# Altium PCB ISL6236A_DEMO_PCB_V1H1.PcbDoc
Units mm, origin at the board's own origin, x right, y up, seen from the top; angles counter-clockwise.
Board outline 50 x 50 mm, 2 copper layers (Top Layer, Bottom Layer); 41 components, 26 nets, 119 pads, 0 vias.
Unrouted connection lines stored in the file: 92.
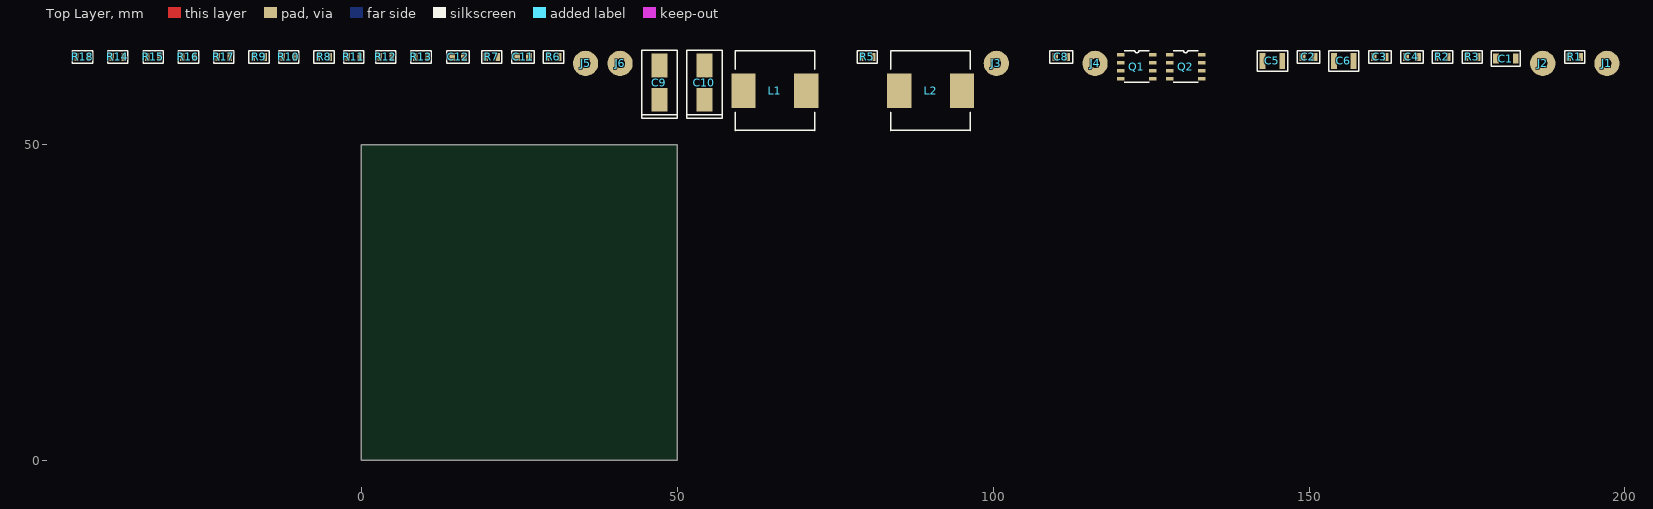
[diagram p0: Top Layer view]
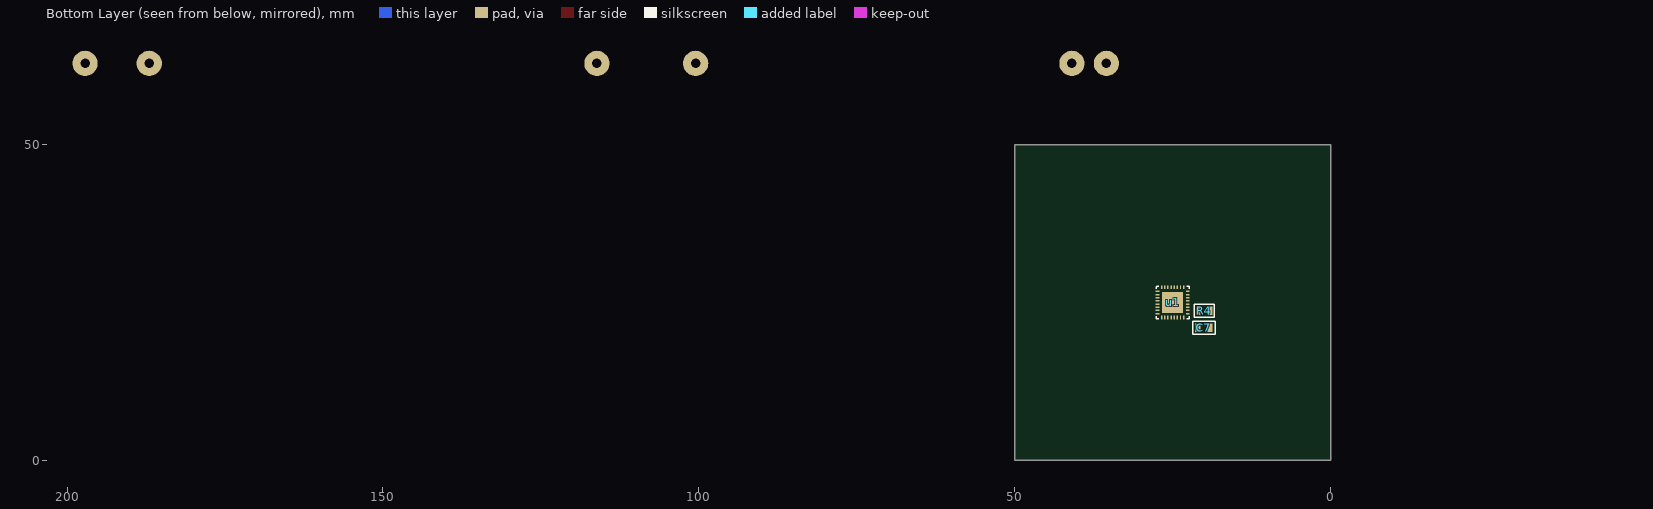
[diagram p1: Bottom Layer view, seen from below]

## Layer stack, top to bottom
Top Solder: solder mask 0.0102, Solder Resist, Dk 3.5
Top Layer: signal copper 0.0356
Dielectric 1: dielectric 0.32, FR-4, Dk 4.8
Bottom Layer: signal copper 0.0356
Bottom Solder: solder mask 0.0102, Solder Resist, Dk 3.5

## Board outline
0,0 50,0 50,50 0,50

## Design rules (kind name [scope] priority, off if disabled: settings)
Clearance [All] p1: gap=0.254 ignorepadtopadclearanceinfootprint=FALSE
MinimumSolderMaskSliver [All] p1: minsoldermaskwidth=0.1
PolygonConnect [All] p1: connectstyle=Relief reliefconductorwidth=0.254 reliefentries=4 polygonreliefangle="90 Angle" airgapwidth=0.254
RoutingVias [All] p1: holewidth=0.711 width=1.27 viastyle="Through Hole" minholewidth=0.711 minwidth=1.27 maxholewidth=0.711 maxwidth=1.27
SilkToSolderMaskClearance [IsPad] p1: minsilkscreentomaskgap=0.1 clearancetoexposedcopper=TRUE
SolderMaskExpansion [All] p1: expansion=0.102 istentingtop=FALSE
SupplyNets "Schematic Supply Nets_5" [InNet('+1v5')] p1: voltage=0.000
SupplyNets "Schematic Supply Nets_4" [InNet('+5v VCC')] p2: voltage=0.000
SupplyNets "Schematic Supply Nets_3" [InNet('GND')] p3: voltage=0.000
SupplyNets "Schematic Supply Nets_2" [InNet('+5v LDO')] p4: voltage=0.000
SupplyNets "Schematic Supply Nets_1" [InNet('+5v PVCC')] p5: voltage=0.000
SupplyNets "Schematic Supply Nets" [InNet('+VIN')] p6: voltage=0.000
Width [All] p1: maxlimit=0.254 minlimit=0.254 preferedwidth=0.254
28 further rules are at their usual default settings.

## Components (designator, comment, footprint, x,y, rotation, side; value= is the part's Value field where it differs from the comment)
C1 "4.7uF 50V" C1206 181.146,63.608 r0 top value=4.7uF
C2 "1 uF, 50 V," C0805 149.904,63.862 r0 top value=1uF
C3 "1 uF, 50 V," C0805 161.207,63.862 r0 top value=1uF
C4 "1 uF, 50 V," C0805 166.287,63.862 r0 top value=1uF
C5 "10uF 50V" C1210 144.189,63.227 r0 top value=10uF
C6 "10uF 50V" C1210 155.492,63.227 r0 top value=10uF
C7 "100nF" C0805 20.05,21 r180 bottom
C8 "220nF" C0805 110.788,63.862 r0 top
C9 "330uF, 10V" 7343-43 47.161,59.798 r90 top value=330uF
C10 "330uF, 10V" 7343-43 54.273,59.798 r90 top value=330uF
C11 "10nF" C0805 25.571,63.862 r0 top
C12 "100nF" C0805 15.284,63.862 r0 top
J1 "4MMx1.5MM" PAD_WITH_HOLE_4MMx1MM 197.148,62.846 r0 top
J2 "4MMx1.5MM" PAD_WITH_HOLE_4MMx1MM 186.988,62.846 r0 top
J3 "4MMx1.5MM" PAD_WITH_HOLE_4MMx1MM 100.501,62.846 r0 top
J4 "4MMx1.5MM" PAD_WITH_HOLE_4MMx1MM 116.122,62.846 r0 top
J5 "4MMx1.5MM" PAD_WITH_HOLE_4MMx1MM 35.477,62.846 r0 top
J6 "4MMx1.5MM" PAD_WITH_HOLE_4MMx1MM 40.938,62.846 r0 top
L1 "3u3, DR125-3R3-R" DR125 65.449,58.528 r0 top value=3.3uH
L2 "2u2, DR125-2R2-R" DR125 90.087,58.528 r0 top value=2.2uH
Q1 "SI4816BDY-T1-E3" SO-8 122.726,62.338 r0 top
Q2 "SI4816BDY-T1-E3" SO-8 130.473,62.338 r0 top
R1 "0 R" R0805 192.068,63.862 r0 top value=0R
R2 "0 R" R0805 171.113,63.862 r0 top value=0R
R3 "10 R" R0805 175.812,63.862 r0 top value=10R
R4 "1 R" R0805 20,23.7 r0 bottom
R5 "1 R" R0805 80.054,63.862 r0 top
R6 "200k" R0805 30.397,63.862 r0 top value=200kR
R7 "200k" R0805 20.618,63.862 r0 top value=200kR
R8 "10K" R0805 -5.925,63.862 r0 top value=10kR
R9 "200k" R0805 -16.212,63.862 r0 top value=200kR
R10 "200k" R0805 -11.513,63.862 r0 top value=200kR
R11 "10K" R0805 -1.226,63.862 r0 top value=10kR
R12 "DNF" R0805 3.854,63.862 r0 top
R13 "0 R" R0805 9.442,63.862 r0 top value=0R
R14 "DNF" R0805 -38.564,63.862 r0 top
R15 "0 R" R0805 -32.976,63.862 r0 top value=0R
R16 "DNF" R0805 -27.388,63.862 r0 top
R17 "DNF" R0805 -21.8,63.862 r0 top
R18 "DNF" R0805 -44.152,63.862 r0 top
u1 "ISL6236AIRZ" L32.5X5B 25,25 r180 bottom

## Footprints (in the part's own frame and the unit in brackets; to place one, negate y for a bottom-side part, rotate by r counter-clockwise, add the part's x,y. Pads: shape width x height; smd on the part's side, far side on the other; paste and mask are expansions set on the pad)
7343-43 [mm]
  rect 3.75x2.55 smd: 1(-2.7,0) 2(2.7,0)
  silkscreen extent -5.6,-2.8 5.1,2.8
C0805 [mm]
  rect 0.9x1.3 smd: 1(-0.95,0) 2(0.95,0)
  silkscreen extent -1.8,-1 1.8,1
C1206 [mm]
  rect 0.9x1.6 smd: 1(-1.55,0) 2(1.55,0)
  silkscreen extent -2.3,-1.2 2.3,1.2
C1210 [mm]
  rect 0.9x2.5 smd: 1(-1.55,0) 2(1.55,0)
  silkscreen extent -2.4,-1.6 2.4,1.6
DR125 [mm]
  rect 3.85x5.5 smd: 1(-4.975,0) 2(4.975,0)
  silkscreen extent -6.3,-6.3 6.3,6.3
L32.5X5B [mm]
  rect 0.6x0.23 smd mask+0.051: 1(-2.4,1.75) 2(-2.4,1.25) 3(-2.4,0.75) 4(-2.4,0.25) 5(-2.4,-0.25) 6(-2.4,-0.75) 7(-2.4,-1.25) 8(-2.4,-1.75) 17(2.4,-1.75) 18(2.4,-1.25) 19(2.4,-0.75) 20(2.4,-0.25) 21(2.4,0.25) 22(2.4,0.75) 23(2.4,1.25) 24(2.4,1.75)
  rect 0.23x0.6 smd mask+0.051: 9(-1.75,-2.4) 10(-1.25,-2.4) 11(-0.75,-2.4) 12(-0.25,-2.4) 13(0.25,-2.4) 14(0.75,-2.4) 15(1.25,-2.4) 16(1.75,-2.4) 25(1.75,2.4) 26(1.25,2.4) 27(0.75,2.4) 28(0.25,2.4) 29(-0.25,2.4) 30(-0.75,2.4) 31(-1.25,2.4) 32(-1.75,2.4)
  rect 3.3x3.3 smd mask+0.051: 33(0,0)
  silkscreen extent -2.6,-2.6 2.6,2.6
PAD_WITH_HOLE_4MMx1MM [mm]
  round 4 hole 1.5: 1(0,0)
R0805 [mm]
  rect 0.7x1.3 smd: 1(-0.95,0) 2(0.95,0)
  silkscreen extent -1.6,-1 1.6,1
SO-8 [mm]
  rect 1.194x0.559 smd: 1(-2.527,1.905) 2(-2.527,0.635) 3(-2.527,-0.635) 4(-2.527,-1.905) 5(2.528,-1.905) 6(2.528,-0.635) 7(2.528,0.635) 8(2.528,1.905)
  silkscreen extent -2,-2.5 2,2.5

## Part data
C1: library part C3216X5R1H475K160AB, "C Series 1206 4.7 uF 50 V ±10 % Tolerance X5R SMT Multilayer Ceramic Capacitor", Case Code (Imperial)=1206, Case Code (Metric)=3216, Dielectric=X5R, Dielectric Material=Ceramic, Manufacturer=TDK, Max Operating Temperature=85°C, Min Operating Temperature=-55°C, Package Quantity=2000, Tolerance=10%, Voltage Rating=50V, Case/Package=1206, Category="Ceramic Capacitors", ComponentLink1Description=https://datasheet.ciiva.com/24216/c3216x5r1h475k160ab-265269-24216325.pdf?src-supplier=Mouser, ComponentLink1URL=https://datasheet.ciiva.com/24216/c3216x5r1h475k160ab-265269-24216325.pdf?src-supplier=Mouser, ComponentLink2Description=https://datasheet.ciiva.com/6286/tdkmlcccaprange-6286230.pdf?src-supplier=Digikey, ComponentLink2URL=https://datasheet.ciiva.com/6286/tdkmlcccaprange-6286230.pdf?src-supplier=Digikey, ComponentLink3Description=https://datasheet.ciiva.com/6286/tdkmlcccaprange-6286233.pdf?src-supplier=Digikey, ComponentLink3URL=https://datasheet.ciiva.com/6286/tdkmlcccaprange-6286233.pdf?src-supplier=Digikey, ComponentLink4Description=https://datasheet.ciiva.com/6286/tdkmlcccaprange-6286236.pdf?src-supplier=Digikey, ComponentLink4URL=https://datasheet.ciiva.com/6286/tdkmlcccaprange-6286236.pdf?src-supplier=Digikey, Construction=Flat, Depth=1.6mm, Height=1.6mm, Lead Free="Lead Free", Length=3.2mm, Manufacturer Part Number=C3216X5R1H475K160AB, Mounting Technology="Surface Mount", Packaging="Tape and Reel", Pricing="487=0.2054, 500=0.1924 (USD)", RoHS=Yes, RoHS Compliant=Yes, Series=C, Stock=714, Supplier="Arrow Electronics", Supplier Part Number=C3216X5R1H475K160AB, Termination=SMD/SMT, Voltage Rating (DC)=50V, Weight=0.000571oz, Width=1.6mm
C2 C3 C4: library part C2012X7R1H105K125AB, "Multilayer Ceramic Capacitor, 1 uF, 50 V, ± 10%, X7R, 0805 [2012 Metric]", Case Code (Imperial)=0805, Case Code (Metric)=2012, Dielectric=X7R, Dielectric Material=Ceramic, Manufacturer=TDK, Max Operating Temperature=125°C, Min Operating Temperature=-55°C, Package Quantity=1, Supplier Part Number=445-7547-1-ND, Tolerance=10%, Voltage Rating=50V, Case/Package=0805, Category="Ceramic Capacitors", ComponentLink1Description=https://datasheet.ciiva.com/6274/tdkmlcccaprange-6274886.pdf?src-supplier=Digikey, ComponentLink1URL=https://datasheet.ciiva.com/6274/tdkmlcccaprange-6274886.pdf?src-supplier=Digikey, ComponentLink2Description=https://datasheet.ciiva.com/6274/tdkmlcccaprange-6274888.pdf?src-supplier=Digikey, ComponentLink2URL=https://datasheet.ciiva.com/6274/tdkmlcccaprange-6274888.pdf?src-supplier=Digikey, ComponentLink3Description=https://datasheet.ciiva.com/6274/tdkmlcccaprange-6274890.pdf?src-supplier=Digikey, ComponentLink3URL=https://datasheet.ciiva.com/6274/tdkmlcccaprange-6274890.pdf?src-supplier=Digikey, ComponentLink4Description=https://datasheet.ciiva.com/22718/1796654-22718037.pdf?src-supplier=Element14, ComponentLink4URL=https://datasheet.ciiva.com/22718/1796654-22718037.pdf?src-supplier=Element14, ComponentLink5Description=https://datasheet.ciiva.com/28673/mlcc-commercial-general-en-28673565.pdf?src-supplier=Element14, ComponentLink5URL=https://datasheet.ciiva.com/28673/mlcc-commercial-general-en-28673565.pdf?src-supplier=Element14, ComponentLink6Description=https://datasheet.ciiva.com/23803/1796654-23803036.pdf?src-supplier=Newark, ComponentLink6URL=https://datasheet.ciiva.com/23803/1796654-23803036.pdf?src-supplier=Newark, ComponentLink7Description=https://datasheet.ciiva.com/24191/general-b11-24191449.pdf?src-supplier=Future+Electronics, ComponentLink7URL=https://datasheet.ciiva.com/24191/general-b11-24191449.pdf?src-supplier=Future+Electronics, Construction=Flat, Depth=1.25mm, Height=1.25mm, Lead Free="Lead Free", Length=2mm, Manufacturer Part Number=C2012X7R1H105K125AB, Material=Ceramic, Mounting Technology="Surface Mount", Packaging="Tape and Reel", Pins=2, Pricing="1=0.28, 10=0.183, 50=0.1286, 100=0.1038, 500=0.07712, 1000=0.06749 (USD)", Reach SVHC Compliant=No, RoHS=Yes, RoHS Compliant=Yes, Series=C, Stock=83488, Supplier=Digikey, Thickness=0.057inch, Width=0.049inch
C5 C6: library part CL32A106KBJNNNE, "Multilayer Ceramic Capacitor, 10 uF, 50 V, ± 10%, X5R, 1210 [3225 Metric]", Case Code (Imperial)=1210, Case Code (Metric)=3225, Manufacturer=Samsung, Max Operating Temperature=85°C, Min Operating Temperature=-55°C, Tolerance=10%, Voltage Rating=50V, Case/Package=1210, Category="Ceramic Capacitors", ComponentLink1Description=https://datasheet.ciiva.com/25711/cl32a106kbjnnne-25711770.pdf?src-supplier=Digikey, ComponentLink1URL=https://datasheet.ciiva.com/25711/cl32a106kbjnnne-25711770.pdf?src-supplier=Digikey, Lead Free="Lead Free", Manufacturer Part Number=CL32A106KBJNNNE, Mounting Technology="Surface Mount", Packaging="Cut Tape", Pricing="577=0.1732, 1000=0.1386, 3000=0.1224, 6000=0.1134, 15000=0.1098, 30000=0.1063, 75000=0.1027 (USD)", RoHS=Yes, RoHS Compliant=Yes, Series=CL, Stock=80351, Supplier="Arrow Electronics", Supplier Part Number=CL32A106KBJNNNE, Voltage Rating (DC)=50V
C7 C12: library part CC0805KRX7R9BB104, "Multilayer Ceramic Capacitor, 0.1 uF, 50 V, ± 10%, X7R, 0805 [2012 Metric]", Case Code (Imperial)=0805, Case Code (Metric)=2012, Dielectric=X7R, Insulation Resistance=100GR, Manufacturer=Yageo, Max Operating Temperature=125°C, Min Operating Temperature=-55°C, Package Quantity=4000, Supplier Part Number=311-1140-1-ND, Tolerance=10%, Voltage=50V, Case/Package=0805, Category="Ceramic Capacitors", ComponentLink1Description=https://datasheet.ciiva.com/11786/0900766b80d84f1d-11786009.pdf?src-supplier=Rs, ComponentLink1URL=https://datasheet.ciiva.com/11786/0900766b80d84f1d-11786009.pdf?src-supplier=Rs, ComponentLink2Description=https://datasheet.ciiva.com/155/mlccorderingcode-155929.pdf?src-supplier=Digikey, ComponentLink2URL=https://datasheet.ciiva.com/155/mlccorderingcode-155929.pdf?src-supplier=Digikey, ComponentLink3Description=https://datasheet.ciiva.com/155/mlccorderingcode-155930.pdf?src-supplier=Digikey, ComponentLink3URL=https://datasheet.ciiva.com/155/mlccorderingcode-155930.pdf?src-supplier=Digikey, ComponentLink4Description=https://datasheet.ciiva.com/155/mlccorderingcode-155931.pdf?src-supplier=Digikey, ComponentLink4URL=https://datasheet.ciiva.com/155/mlccorderingcode-155931.pdf?src-supplier=Digikey, ComponentLink5Description=https://datasheet.ciiva.com/11464/upy-gphc-x7r-6-3v-to-50v-8-11464757.pdf?src-supplier=Avnet, ComponentLink5URL=https://datasheet.ciiva.com/11464/upy-gphc-x7r-6-3v-to-50v-8-11464757.pdf?src-supplier=Avnet, ComponentLink6Description=https://datasheet.ciiva.com/46393/1734573-46393307.pdf?src-supplier=Element14, ComponentLink6URL=https://datasheet.ciiva.com/46393/1734573-46393307.pdf?src-supplier=Element14, ComponentLink7Description=https://datasheet.ciiva.com/28450/1489800-28450805.pdf?src-supplier=Element14, ComponentLink7URL=https://datasheet.ciiva.com/28450/1489800-28450805.pdf?src-supplier=Element14, ComponentLink8Description=https://datasheet.ciiva.com/29242/445210-da-01-en-kerko-chip-0805-x7r-0-1uf-10proz-50vg-29242074.pdf?src-supplier=Conrad, ComponentLink8URL=https://datasheet.ciiva.com/29242/445210-da-01-en-kerko-chip-0805-x7r-0-1uf-10proz-50vg-29242074.pdf?src-supplier=Conrad, Depth=1.25mm, Halogen Free="Halogen Free", Height=0.85mm, Lead Free="Lead Free", Length=2mm, Manufacturer Part Number=CC0805KRX7R9BB104, Material=Ceramic, Mounting Technology="Surface Mount", Packaging="Tape and Reel", Pins=2, Pricing="1=0.1, 10=0.07, 50=0.0418, 100=0.0329, 500=0.02428, 1000=0.0201 (USD)", Radiation Hardening=No, Reach SVHC Compliant=No, RoHS=Yes, RoHS Compliant=Yes, Series=CC, Stock=4695891, Supplier=Digikey, Termination=SMD/SMT, Voltage Rating=50V
C8: library part C0805C224K5RACTU, "Multilayer Ceramic Capacitor, 0.22 uF, 50 V, ± 10%, X7R, 0805 [2012 Metric]", Case Code (Imperial)=0805, Case Code (Metric)=2012, Dielectric=X7R, Dielectric Material=Ceramic, Manufacturer=KEMET, Max Operating Temperature=125°C, Min Operating Temperature=-55°C, Package Quantity=4000, Supplier Part Number=399-C0805C224K5RACTUDKR-ND, Temperature Coefficient=30ppm/°C, Tolerance=10%, Voltage=50V, Case/Package=0805, Category="Ceramic Capacitors", ComponentLink1Description=https://datasheet.ciiva.com/7842/kem-c1002-x7r-smd-7842582.pdf?src-supplier=Element14, ComponentLink1URL=https://datasheet.ciiva.com/7842/kem-c1002-x7r-smd-7842582.pdf?src-supplier=Element14, ComponentLink2Description=https://datasheet.ciiva.com/28682/1851736-28682316.pdf?src-supplier=Element14, ComponentLink2URL=https://datasheet.ciiva.com/28682/1851736-28682316.pdf?src-supplier=Element14, ComponentLink3Description=https://datasheet.ciiva.com/18193/getdatasheetpartid-304413-18193686.pdf?src-supplier=Verical, ComponentLink3URL=https://datasheet.ciiva.com/18193/getdatasheetpartid-304413-18193686.pdf?src-supplier=Verical, Construction=Flat, Depth=1.25mm, Dissipation Factor=2.5%, Height=1.1mm, Lead Free="Lead Free", Lead Pitch=0.75mm, Length=2mm, Manufacturer Part Number=C0805C224K5RACTU, Material=Ceramic, Mounting Technology="Surface Mount,PCB", Packaging="Tape and Reel", Pricing="1=0.16, 10=0.106, 50=0.063, 100=0.0496, 500=0.03666, 1000=0.03035 (USD)", Radiation Hardening=No, Reach SVHC Compliant=No, RoHS=Yes, RoHS Compliant=Yes, Series="SMD Comm X7R", Stock=486457, Supplier=Digikey, Termination=SMD/SMT, Voltage Rating=50V, Voltage Rating (DC)=50V, Width=1.2mm
C9 C10: library part T530X337M010ATE004, "Cap Tant Solid 330uF 10V X CASE 20% (7.3 X 4.3 X 4mm) SMD 7343-43 0.004 Ohm 125 C T/R", Case Code (Imperial)=2917, Case Code (Metric)=7343, ESR (Equivalent Series Resistance)=4mR, Leakage Current=330uA, Manufacturer=KEMET, Max Operating Temperature=125°C, Min Operating Temperature=-55°C, Package Quantity=500, Ripple Current=8.2A, Supplier Part Number=399-10378-1-ND, Tolerance=20%, Voltage=10V, Case/Package=2917, Category="Polymer Capacitors", ComponentLink1Description=https://datasheet.ciiva.com/11794/0900766b80deaa91-11794477.pdf?src-supplier=Rs, ComponentLink1URL=https://datasheet.ciiva.com/11794/0900766b80deaa91-11794477.pdf?src-supplier=Rs, ComponentLink2Description=https://datasheet.ciiva.com/14593/70096008-14593753.pdf?src-supplier=Allied+Electronics, ComponentLink2URL=https://datasheet.ciiva.com/14593/70096008-14593753.pdf?src-supplier=Allied+Electronics, Construction=Flat, Depth=4.3mm, Dissipation Factor=8%, Features="General Purpose", Height=4mm, Length=7.3mm, Manufacturer Part Number=T530X337M010ATE004, Mounting Technology="Surface Mount,PCB", Packaging="Tape and Reel", Polarity=Polar, Pricing="1=7.14, 10=6.191, 50=5.5562, 100=4.8259 (USD)", Reach SVHC Compliant=No, RoHS=Yes, RoHS Compliant=Yes, Series=T530, Stock=865, Supplier=Digikey, Termination=SMD/SMT, Voltage Rating=10V, Voltage Rating (DC)=10V, Width=4.3mm
C11: library part C0805C103K5RACTU, "Multilayer Ceramic Capacitor, 0.01 uF, 50 V, ± 10%, X7R, 0805 [2012 Metric]", Case Code (Imperial)=0805, Case Code (Metric)=2012, Dielectric=X7R, Dielectric Material=Ceramic, Manufacturer=KEMET, Max Operating Temperature=125°C, Min Operating Temperature=-55°C, Supplier Part Number=399-C0805C103K5RACTUTR-ND, Temperature Coefficient=30ppm/°C, Tolerance=10%, Voltage=50V, Case/Package=0805, Category="Ceramic Capacitors", ComponentLink1Description=http://www.onlinecomponents.com/productFiles/mf-KEM/kem_c1002_x7r_smd.pdf?src-supplier=Onlinecomponents.com, ComponentLink1URL=http://www.onlinecomponents.com/productFiles/mf-KEM/kem_c1002_x7r_smd.pdf?src-supplier=Onlinecomponents.com, ComponentLink2Description=http://www.farnell.com/datasheets/2740682.pdf?src-supplier=Farnell, ComponentLink2URL=http://www.farnell.com/datasheets/2740682.pdf?src-supplier=Farnell, ComponentLink3Description=https://www.verical.com/server-webapp/html/getDatasheet?partID=293414&src-supplier=Verical, ComponentLink3URL=https://www.verical.com/server-webapp/html/getDatasheet?partID=293414&src-supplier=Verical, ComponentLink4Description=https://api.kemet.com/component-edge/download/datasheet/C0805C103K5RACTU.pdf?src-supplier=Digikey, ComponentLink4URL=https://api.kemet.com/component-edge/download/datasheet/C0805C103K5RACTU.pdf?src-supplier=Digikey, ComponentLink5Description=https://datasheet.octopart.com/C0805C103K5RACTU-Kemet-datasheet-24570007.pdf?src-supplier=Element14, ComponentLink5URL=https://datasheet.octopart.com/C0805C103K5RACTU-Kemet-datasheet-24570007.pdf?src-supplier=Element14, ComponentLink6Description=http://www.farnell.com/datasheets/2740682.pdf?src-supplier=Element14, ComponentLink6URL=http://www.farnell.com/datasheets/2740682.pdf?src-supplier=Element14, ComponentLink7Description=http://www.farnell.com/datasheets/2740682.pdf?src-supplier=Newark, ComponentLink7URL=http://www.farnell.com/datasheets/2740682.pdf?src-supplier=Newark, ComponentLink8Description=http://www.kemet.com/Lists/ProductCatalog/Attachments/53/KEM_C1002_X7R_SMD.pdf?src-supplier=Avnet, ComponentLink8URL=http://www.kemet.com/Lists/ProductCatalog/Attachments/53/KEM_C1002_X7R_SMD.pdf?src-supplier=Avnet, ComponentLink9Description=https://datasheet.octopart.com/C0805C103K5RAC7800-KEMET-datasheet-37550250.pdf?src-supplier=Electro+Sonic, ComponentLink9URL=https://datasheet.octopart.com/C0805C103K5RAC7800-KEMET-datasheet-37550250.pdf?src-supplier=Electro+Sonic, ComponentLink10Description=https://datasheet.octopart.com/C0805C103K5RACTU-KEMET-datasheet-164512540.pdf?src-supplier=TME, ComponentLink10URL=https://datasheet.octopart.com/C0805C103K5RACTU-KEMET-datasheet-164512540.pdf?src-supplier=TME, Construction=Flat, Depth=1.25mm, Height=0.78mm, Lead Free="Lead Free", Length=2mm, Manufacturer Part Number=C0805C103K5RACTU, Material=Ceramic, Mounting Technology="Surface Mount", Packaging="Tape and Reel", Pins=2NUMBER, Pricing="4000=0.01737, 8000=0.01616, 12000=0.01535, 28000=0.01454, 100000=0.01101, 200000=0.01075, 400000=0.0101 (USD)", Radiation Hardening=No, Reach SVHC Compliant=No, RoHS=Yes, Series="SMD Comm X7R", Stock=1358518, Supplier=Digikey, Thickness=889um, Voltage Rating=50V, Voltage Rating (AC)=50V
J1 J2 J3 J4 J5 J6: library part PAD_WITH_HOLE_4MMx1MM, "Pad with a hole 4mm x 1.5 mm"
L1: library part DR125-3R3-R, "Inductor Power Shielded Drum Core 3.3uH 20% 100KHz Ferrite 9.26A 6.3mOhm DCR T/R", Case/Package=Nonstandard, Current Rating=9.26A, DC Resistance (DCR)=6.3mR, Inductance Tolerance=20%, Manufacturer="Eaton Cooper", Max Operating Temperature=125°C, Min Operating Temperature=-40°C, Package Quantity=600, Saturation Current=12.7A, Supplier Part Number=513-1529-1-ND, Test Frequency=100kHz, Category="Fixed Inductors", ComponentLink1Description=https://datasheet.ciiva.com/26858/getdatasheetpartid-251124-26858392.pdf?src-supplier=Verical, ComponentLink1URL=https://datasheet.ciiva.com/26858/getdatasheetpartid-251124-26858392.pdf?src-supplier=Verical, ComponentLink2Description=https://datasheet.ciiva.com/5707/87246-5707962.pdf?src-supplier=Farnell, ComponentLink2URL=https://datasheet.ciiva.com/5707/87246-5707962.pdf?src-supplier=Farnell, ComponentLink3Description=https://datasheet.ciiva.com/16295/bus-elx-ds-4315-dr-series-16295562.pdf?src-supplier=Future+Electronics, ComponentLink3URL=https://datasheet.ciiva.com/16295/bus-elx-ds-4315-dr-series-16295562.pdf?src-supplier=Future+Electronics, ComponentLink4Description=https://datasheet.ciiva.com/30081/4a32919a-7470-4ae0-be45-b59e3a1351ef-30081146.pdf?src-supplier=Onlinecomponents.com, ComponentLink4URL=https://datasheet.ciiva.com/30081/4a32919a-7470-4ae0-be45-b59e3a1351ef-30081146.pdf?src-supplier=Onlinecomponents.com, Core Material=Ferrite, Depth=12.5mm, Height=6mm, Height - Seated (Max)=0.236inch, Lead Free="Lead Free", Length=12.5mm, Manufacturer Part Number=DR125-3R3-R, Max Current Rating=9.26A, Max DC Current=9.26A, Military Standard=Not, Mounting Technology="Surface Mount", Packaging="Tape and Reel", Pins=2, Pricing="1=0.81, 10=0.683, 25=0.6212, 50=0.584, 100=0.4845, 250=0.44728 (USD)", Radiation Hardening=No, Reach SVHC Compliant=No, RMS Current (Irms)=9.26A, RoHS=Yes, Series=DR, Shielding=Shielded, Stock=24147, Supplier=Digikey, Termination=SMD/SMT, Tolerance=20%, Weight=0.144oz, Width=0.492inch
L2: library part DR125-2R2-R, "Ind Power Shielded Wirewound 2.2uH 20% 100KHz Ferrite 10.9A T/R", Case/Package=Nonstandard, Current Rating=10.9A, DC Resistance (DCR)=4.5mR, Inductance Tolerance=20%, Manufacturer="Eaton Cooper", Max Operating Temperature=125°C, Min Operating Temperature=-40°C, Package Quantity=600, Saturation Current=15A, Self Resonant Frequency=100kHz, Supplier Part Number=513-1662-1-ND, Category="Fixed Inductors", ComponentLink1Description=https://datasheet.ciiva.com/14667/0900766b8116a153-14667792.pdf?src-supplier=Rs, ComponentLink1URL=https://datasheet.ciiva.com/14667/0900766b8116a153-14667792.pdf?src-supplier=Rs, ComponentLink2Description=https://datasheet.ciiva.com/26926/getdatasheetpartid-571249-26926912.pdf?src-supplier=Verical, ComponentLink2URL=https://datasheet.ciiva.com/26926/getdatasheetpartid-571249-26926912.pdf?src-supplier=Verical, ComponentLink3Description=https://datasheet.ciiva.com/8004/87246-8004874.pdf?src-supplier=Element14, ComponentLink3URL=https://datasheet.ciiva.com/8004/87246-8004874.pdf?src-supplier=Element14, Core Material=Ferrite, DC Current=10.9A, Depth=12.5mm, Height=6mm, Height - Seated (Max)=0.236inch, Lead Free="Lead Free", Length=12.5mm, Manufacturer Part Number=DR125-2R2-R, Max Current Rating=10.9A, Max DC Current=10.9A, Military Standard=Not, Mounting Technology="Surface Mount", Packaging="Tape and Reel", Pins=2, Pricing="1=1.21, 10=1.02, 25=0.9276, 50=0.8718, 100=0.7234, 250=0.6678 (USD)", Radiation Hardening=No, Reach SVHC Compliant=No, RMS Current (Irms)=10.9A, RoHS=Yes, RoHS Compliant=Yes, Series=DR, Shielding=Shielded, Stock=2128, Supplier=Digikey, Termination=SMD/SMT, Test Frequency=100kHz, Tolerance=20%, Weight=0.144oz, Width=0.492inch
Q1 Q2: "Transistor MOSFET Array Dual N-CH 30V 5.8A/8.2A 8-Pin SOIC T/R", Case/Package=SO, Continuous Drain Current (ID)=8.2A, Drain to Source Resistance=11.5mR, Drain to Source Voltage (Vdss)=30V, Drain-source On Resistance-Max=18.5mR, Gate to Source Voltage (Vgs)=20V, Manufacturer="Vishay Siliconix", Max Operating Temperature=150°C, Max Power Dissipation=1.25W, Min Operating Temperature=-55°C, Package Quantity=2500, Supplier Part Number=SI4816BDY-T1-E3CT-ND, Threshold Voltage=1V, Category=MOSFETs, ComponentLink1Description=https://datasheet.ciiva.com/7710/si4816bd-7710449.pdf?src-supplier=Element14, ComponentLink1URL=https://datasheet.ciiva.com/7710/si4816bd-7710449.pdf?src-supplier=Element14, ComponentLink2Description=https://datasheet.ciiva.com/15137/getdatasheetpartid-99188-15137841.pdf?src-supplier=Verical, ComponentLink2URL=https://datasheet.ciiva.com/15137/getdatasheetpartid-99188-15137841.pdf?src-supplier=Verical, ComponentLink3Description=https://datasheet.ciiva.com/928/si4816bd-928458.pdf?src-supplier=Digikey, ComponentLink3URL=https://datasheet.ciiva.com/928/si4816bd-928458.pdf?src-supplier=Digikey, ComponentLink4Description=https://datasheet.ciiva.com/928/si4816bd-928459.pdf?src-supplier=Digikey, ComponentLink4URL=https://datasheet.ciiva.com/928/si4816bd-928459.pdf?src-supplier=Digikey, ComponentLink5Description=https://datasheet.ciiva.com/928/si4816bd-928460.pdf?src-supplier=Digikey, ComponentLink5URL=https://datasheet.ciiva.com/928/si4816bd-928460.pdf?src-supplier=Digikey, ComponentLink6Description=https://datasheet.ciiva.com/11161/si4816bd-11161496.pdf?src-supplier=Avnet, ComponentLink6URL=https://datasheet.ciiva.com/11161/si4816bd-11161496.pdf?src-supplier=Avnet, ComponentLink7Description=https://datasheet.ciiva.com/16486/si4816bd-16486349.pdf?src-supplier=Future+Electronics, ComponentLink7URL=https://datasheet.ciiva.com/16486/si4816bd-16486349.pdf?src-supplier=Future+Electronics, ComponentLink8Description=https://datasheet.ciiva.com/18448/70026226-18448822.pdf?src-supplier=Allied+Electronics, ComponentLink8URL=https://datasheet.ciiva.com/18448/70026226-18448822.pdf?src-supplier=Allied+Electronics, Fall Time=9ns, FET Type="2 N-Channel", Height=1.55mm, Lead Free="Lead Free", Length=5mm, Manufacturer Part Number=SI4816BDY-T1-E3, Mounting Technology="Surface Mount", Nominal Vgs=3V, Number of Channels=2, Number of Elements=2, Packaging="Tape and Reel", Pins=8, Polarity=N-CHANNEL, Pricing="1=1.58, 10=1.311, 100=1.0438, 500=0.88324, 1000=0.74942 (USD)", Radiation Hardening=No, Rds On Max=18.5mR, Reach SVHC Compliant=Unknown, Rise Time=9ns, RoHS=Yes, RoHS Compliant=Yes, Series="LITTLE FOOT®", Stock=4824, Supplier=Digikey, Turn-Off Delay Time=31ns, Turn-On Delay Time=13ns, Weight=0.006596oz, Width=4mm
R1 R2 R13 R15: library part AC0805JR-070RL, "Zero Ohm Resistor, 0805 [2012 Metric], Thick Film, 125 mW, 2 A, Surface Mount", Case Code (Imperial)=0805, Case Code (Metric)=2012, Manufacturer=Yageo, Max Operating Temperature=155°C, Max Power Dissipation=125mW, Min Operating Temperature=-55°C, Supplier Part Number=YAG3755CT-ND, Temperature Coefficient=200ppm/°C, Tolerance=5%, Voltage Rating=150V, Case/Package=0805, Category="Chip SMD Resistors", ComponentLink1Description=http://www.yageo.com/NewPortal/yageodocoutput?fileName=/pdf/R-Chip/PYu-AC_51_RoHS_L_6.pdf&src-supplier=Digikey, ComponentLink1URL=http://www.yageo.com/NewPortal/yageodocoutput?fileName=/pdf/R-Chip/PYu-AC_51_RoHS_L_6.pdf&src-supplier=Digikey, ComponentLink2Description=https://datasheet.octopart.com/AC0805JR-070RL-Yageo-datasheet-151884373.pdf?src-supplier=Future+Electronics, ComponentLink2URL=https://datasheet.octopart.com/AC0805JR-070RL-Yageo-datasheet-151884373.pdf?src-supplier=Future+Electronics, ComponentLink3Description=http://www.yageo.com/documents/recent/PYu-AC_51_RoHS_L_2.pdf?src-supplier=Mouser, ComponentLink3URL=http://www.yageo.com/documents/recent/PYu-AC_51_RoHS_L_2.pdf?src-supplier=Mouser, Features="Moisture Resistant,Automotive AEC-Q200", Height=0.024inch, Lead Free="Lead Free", Length=0.079inch, Manufacturer Part Number=AC0805JR-070RL, Number of Terminations=2, Packaging="Tape and Reel", Power Rating=125mW, Pricing="1=0.1, 10=0.035, 25=0.0272, 50=0.0206, 100=0.0144, 250=0.0116, 500=0.00928, 1000=0.00683 (USD)", RoHS=Yes, RoHS Compliant=Yes, Series=AC, Stock=196311, Supplier=Digikey, Termination=SMD/SMT, Width=1.25mm
R3: library part AC0805FR-0710RL, "SMD Chip Resistor, 10 Ohm, ± 1%, 125 mW, 0805 [2012 Metric], Thick Film, General Purpose", Case Code (Imperial)=0805, Case Code (Metric)=2012, Manufacturer=Yageo, Max Operating Temperature=155°C, Max Power Dissipation=125mW, Min Operating Temperature=-55°C, Supplier Part Number=YAG3690DKR-ND, Temperature Coefficient=200ppm/°C, Tolerance=1%, Voltage Rating=150V, Case/Package=0805, Category="Chip SMD Resistors", ComponentLink1Description=http://www.mouser.com/ds/2/447/yageodocoutput-1111992.pdf?src-supplier=Mouser, ComponentLink1URL=http://www.mouser.com/ds/2/447/yageodocoutput-1111992.pdf?src-supplier=Mouser, ComponentLink2Description=http://www.yageo.com/NewPortal/yageodocoutput?fileName=/pdf/R-Chip/PYu-AC_51_RoHS_L_6.pdf&src-supplier=Digikey, ComponentLink2URL=http://www.yageo.com/NewPortal/yageodocoutput?fileName=/pdf/R-Chip/PYu-AC_51_RoHS_L_6.pdf&src-supplier=Digikey, ComponentLink3Description=https://www.yageo.com/upload/media/product/productsearch/datasheet/rchip/PYu-AC_51_RoHS_L_7.pdf?src-supplier=Digikey, ComponentLink3URL=https://www.yageo.com/upload/media/product/productsearch/datasheet/rchip/PYu-AC_51_RoHS_L_7.pdf?src-supplier=Digikey, ComponentLink4Description=http://www.yageo.com/documents/recent/PYu-AC_51_RoHS_L_2_revised.pdf?src-supplier=Future+Electronics, ComponentLink4URL=http://www.yageo.com/documents/recent/PYu-AC_51_RoHS_L_2_revised.pdf?src-supplier=Future+Electronics, ComponentLink5Description=https://datasheet.octopart.com/AC0805FR-0710RL-Yageo-datasheet-166720450.pdf?src-supplier=Future+Electronics, ComponentLink5URL=https://datasheet.octopart.com/AC0805FR-0710RL-Yageo-datasheet-166720450.pdf?src-supplier=Future+Electronics, ComponentLink6Description=https://datasheet.octopart.com/AC0805FR-0710RL-Yageo-datasheet-159083007.pdf?src-supplier=TME, ComponentLink6URL=https://datasheet.octopart.com/AC0805FR-0710RL-Yageo-datasheet-159083007.pdf?src-supplier=TME, Features="Moisture Resistant,Automotive AEC-Q200", Height=0.024inch, Lead Free="Lead Free", Length=0.079inch, Manufacturer Part Number=AC0805FR-0710RL, Number of Terminations=2, Packaging="Tape and Reel", Power Rating=125mW, Pricing="1=0.11, 10=0.052, 50=0.0338, 100=0.0286, 500=0.02014, 1000=0.01754 (USD)", RoHS=Yes, RoHS Compliant=Yes, Series=AC, Stock=167567, Supplier=Digikey, Termination=SMD/SMT, Width=1.25mm
R4 R5: library part AC0805FR-071RL, "SMD Chip Resistor, 1 Ohm, ± 1%, 125 mW, 0805 [2012 Metric], Thick Film, General Purpose", Manufacturer=Yageo, Supplier Part Number=YAG3705CT-ND, Category="Chip SMD Resistors", ComponentLink1Description=https://datasheet.ciiva.com/12576/pyu-ac-51-rohs-l-2-12576553.pdf?src-supplier=Mouser, ComponentLink1URL=https://datasheet.ciiva.com/12576/pyu-ac-51-rohs-l-2-12576553.pdf?src-supplier=Mouser, ComponentLink2Description=https://datasheet.octopart.com/AC0805FR-071RL-Yageo-datasheet-12512238.pdf, ComponentLink2URL=https://datasheet.octopart.com/AC0805FR-071RL-Yageo-datasheet-12512238.pdf, ComponentLink3Description=https://datasheet.octopart.com/AC0805FR-071RL-Yageo-datasheet-166720450.pdf?src-supplier=Future+Electronics, ComponentLink3URL=https://datasheet.octopart.com/AC0805FR-071RL-Yageo-datasheet-166720450.pdf?src-supplier=Future+Electronics, ComponentLink4Description=https://datasheet.octopart.com/AC0805FR-071RL-Yageo-datasheet-151884373.pdf?src-supplier=Future+Electronics, ComponentLink4URL=https://datasheet.octopart.com/AC0805FR-071RL-Yageo-datasheet-151884373.pdf?src-supplier=Future+Electronics, ComponentLink5Description=https://datasheet.octopart.com/AC0805FR-071RL-Yageo-datasheet-137699919.pdf?src-supplier=Future+Electronics, ComponentLink5URL=https://datasheet.octopart.com/AC0805FR-071RL-Yageo-datasheet-137699919.pdf?src-supplier=Future+Electronics, ComponentLink6Description=https://datasheet.octopart.com/AC0805FR-071RL-Yageo-datasheet-24580492.pdf?src-supplier=Future+Electronics, ComponentLink6URL=https://datasheet.octopart.com/AC0805FR-071RL-Yageo-datasheet-24580492.pdf?src-supplier=Future+Electronics, ComponentLink7Description=https://datasheet.octopart.com/AC0805FR-071RL-Yageo-datasheet-13029202.pdf?src-supplier=Future+Electronics, ComponentLink7URL=https://datasheet.octopart.com/AC0805FR-071RL-Yageo-datasheet-13029202.pdf?src-supplier=Future+Electronics, Lead Free=5697LeadFree, Manufacturer Part Number=AC0805FR-071RL, Pricing="1=0.1, 10=0.036, 50=0.0238, 100=0.0201, 500=0.01416, 1000=0.01233 (USD)", Stock=71458, Supplier=Digikey
R6 R7 R9 R10: library part AC0805FR-07200KL, "SMD Chip Resistor, 200 kOhm, ± 1%, 125 mW, 0805 [2012 Metric], Thick Film, General Purpose", Case Code (Imperial)=0805, Case Code (Metric)=2012, Manufacturer=Yageo, Max Operating Temperature=155°C, Min Operating Temperature=-55°C, Package Quantity=5000, Power Rating=125mW, Supplier Part Number=49AK0752, Temperature Coefficient=100ppm/°C, Tolerance=1%, Voltage Rating=150V, Category="Chip SMD Resistors", ComponentLink1Description=http://www.mouser.com/ds/2/447/yageodocoutput-1111992.pdf?src-supplier=Mouser, ComponentLink1URL=http://www.mouser.com/ds/2/447/yageodocoutput-1111992.pdf?src-supplier=Mouser, ComponentLink2Description=http://www.yageo.com/NewPortal/yageodocoutput?fileName=/pdf/R-Chip/PYu-AC_51_RoHS_L_6.pdf&src-supplier=Digikey, ComponentLink2URL=http://www.yageo.com/NewPortal/yageodocoutput?fileName=/pdf/R-Chip/PYu-AC_51_RoHS_L_6.pdf&src-supplier=Digikey, ComponentLink3Description=http://www.yageo.com/documents/recent/PYu-AC_51_RoHS_L_2.pdf?src-supplier=Future+Electronics, ComponentLink3URL=http://www.yageo.com/documents/recent/PYu-AC_51_RoHS_L_2.pdf?src-supplier=Future+Electronics, ComponentLink4Description=https://datasheet.octopart.com/AC0805FR-07200KL-Yageo-datasheet-166720450.pdf?src-supplier=Future+Electronics, ComponentLink4URL=https://datasheet.octopart.com/AC0805FR-07200KL-Yageo-datasheet-166720450.pdf?src-supplier=Future+Electronics, ComponentLink5Description=https://datasheet.octopart.com/AC0805FR-07200KL-Yageo-datasheet-140571090.pdf?src-supplier=Arrow.cn, ComponentLink5URL=https://datasheet.octopart.com/AC0805FR-07200KL-Yageo-datasheet-140571090.pdf?src-supplier=Arrow.cn, Height=0.5mm, Lead Free="Lead Free", Length=2mm, Manufacturer Part Number=AC0805FR-07200KL, Packaging="Cut Tape", Pricing="1=0.104, 25=0.021, 50=0.017, 100=0.012 (USD)", RoHS=Yes, RoHS Compliant=Yes, Series=AC, Stock=3488, Supplier=Avnet, Technology="THICK FILM", Termination=SMD/SMT, Weight=0.000194oz, Width=1.25mm
R8 R11: library part RC0805FR-0710KL, "SMD Chip Resistor, 10 kOhm, ± 1%, 125 mW, 0805 [2012 Metric], Thick Film, General Purpose", Case Code (Imperial)=0805, Case Code (Metric)=2012, Manufacturer=Yageo, Max Operating Temperature=155°C, Max Power Dissipation=125mW, Min Operating Temperature=-55°C, Package Quantity=1, Resistance Tolerance=1%, Resistor Type="Thick Film", Supplier Part Number=3310877, Temperature Coefficient=100ppm/°C, Voltage Rating=150V, Case/Package=0805, Category="Chip SMD Resistors", Construction=Rectangular, Depth=1.25mm, Features="Moisture Resistant", Height=0.024inch, Lead Free="Lead Free", Length=0.079inch, Manufacturer Part Number=RC0805FR-0710KL, Military Standard=Not, Number of Terminations=2, Packaging="Tape and Reel", Power Rating=125mW, Pricing="5000=0.004, 25000=0.0038, 100000=0.0036, 250000=0.0034, 625000=0.0032 (USD)", Reach SVHC Compliant=Unknown, RoHS=Yes, RoHS Compliant=Yes, Series=RC, Stock=7825000, Supplier="Future Electronics", Technology="THICK FILM", Termination=SMD/SMT, Tolerance=1%, Voltage Rating (AC)=150V, Width=0.049inch
R12 R14 R16 R17 R18: library part RES
u1: "ISL6236A Series 25 V Dual Step-Down Switch-Mode Power-Supply Controller - QFN-32", Case/Package=QFN, Frequency=500kHz, Manufacturer=Renesas, Max Operating Temperature=100°C, Max Supply Voltage=25V, Min Input Voltage=5.5V, Min Operating Temperature=-40°C, Nominal Output Voltage=1.05V, Nominal Supply Voltage=12V, Output Current=20A, Package Body Material=Plastic, Package Quantity=60, Package Shape=Square, Package Style="CHIP CARRIER, HEAT SINK/SLUG, VERY THIN PROFILEMeter", Peak Reflow Temperature (Cel)=260°C, Supplier Part Number=ISL6236AIRZ-ND, Temperature Grade=INDUSTRIAL, Time @ Peak Reflow Temperature-Max (s)=30s, Category="Integrated Circuits (ICs)", Channels=1, ComponentLink1Description=http://www.intersil.com/content/dam/Intersil/documents/isl6/isl6236a.pdf?src-supplier=Digikey, ComponentLink1URL=http://www.intersil.com/content/dam/Intersil/documents/isl6/isl6236a.pdf?src-supplier=Digikey, ComponentLink2Description=https://datasheet.octopart.com/ISL6236AIRZ-Renesas-datasheet-138160199.pdf?src-supplier=Future+Electronics, ComponentLink2URL=https://datasheet.octopart.com/ISL6236AIRZ-Renesas-datasheet-138160199.pdf?src-supplier=Future+Electronics, Control Mode=CURRENT-MODE, Control Technique="PULSE WIDTH MODULATION", Height=0.95mm, Height - Seated (Max)=1mm, JESD-30 Code=S-PQCC-N32, JESD-609 Code=e3, Length=5mm, Manufacturer Part Number=ISL6236AIRZ, Moisture Sensitivity Level=3, Mounting Technology="Surface Mount", Number of Outputs=4, Output Voltage=5.5V, Packaging=Rail/Tube, Pins=32, Pricing="1=6.37, 10=5.754, 25=5.4868, 80=4.76413, 230=4.55004, 490=4.14857, 980=3.61328, 2450=3.47945 (USD)", Reach SVHC Compliant=Yes, RoHS=Yes, RoHS Compliant=Yes, Series=-, Stock=2220, Supplier=Digikey, Surface Mount=Yes, Switcher Configuration=BUCK, Switching Frequency=500kHz, Technology=BICMOS, Terminal Finish=Tin, Terminal Form="No Lead", Terminal Pitch=0.5mm, Terminal Position=QUAD, Throw Configuration="DUAL SWITCHING CONTROLLER", Weight=0.002469oz, Width=5mm

## Nets (pads, with @x,y where several pads share a name; then routed paths per layer and width w, separated by ;. In a path a pad name is that pad's centre, name@x,y a point inside that pad or via, vN(x,y) a via of type N, cw(c..) or ccw(c..) an arc to the next point about the centre after c; other vN are vias at no path point)
+1v5: C9.1 C10.1 J3.1 J4.1 L1.1 L2.2 R12.2 u1.10 u1.30
"+5v LDO": C1.2 R1.2 u1.7
"+5v PVCC": C3.2 R1.1 R2.2 R3.1 u1.19
"+5v VCC": C4.2 R3.2 R8.2 R9.2 R10.2 R11.2 R13.1 R16.2 u1.2 u1.3 u1.20
+REF: C12.1 R14.2 u1.1
+VIN: C2.2 C5.2 C6.2 J1.1 Q1.8 Q2.8 R2.1 u1.6
+VREF3: C11.1 R15.2 u1.5
EN1: R11.1 u1.14
EN_LDO: R8.1 u1.4
FB1: R12.1 R13.2 R17.2 u1.11
GND: C1.1 C2.1 C3.1 C4.1 C5.1 C6.1 C9.2 C10.2 C11.2 C12.2 J2.1 J5.1 J6.1 Q1.2 Q1.3 Q2.2 Q2.3 R6.2 R7.1 R17.1 R18.1 u1.8 u1.21 u1.22 u1.29 u1.33
LGATE1: Q1.4 u1.18
LGATE2: Q2.4 u1.23
NetC7_2: C7.2 R4.1
NetC8_1: C8.1 R5.2
NetR4_2: R4.2 u1.17
NetR5_1: R5.1 u1.24
NetR6_1: R6.1 u1.31
NetR7_2: R7.2 u1.12
PHASE1: C7.1 L1.2 Q1.5 Q1.6 Q1.7 u1.16
PHASE2: C8.2 L2.1 Q2.5 Q2.6 Q2.7 u1.25
POK1: R10.1 u1.13 u1.27
POK2: R9.1 u1.28
REFIN2: R14.1 R15.1 R16.1 R18.2 u1.32
UGATE1: Q1.1 u1.15
UGATE2: Q2.1 u1.26
pads on no net: u1.9